# Altium PCB main.PcbDoc
Units mm, origin at the board's own origin, x right, y up, seen from the top; angles counter-clockwise.
Board outline 32 x 43.5 mm, 2 copper layers (Top Layer, Bottom Layer); 24 components, 10 nets, 55 pads, 11 vias.
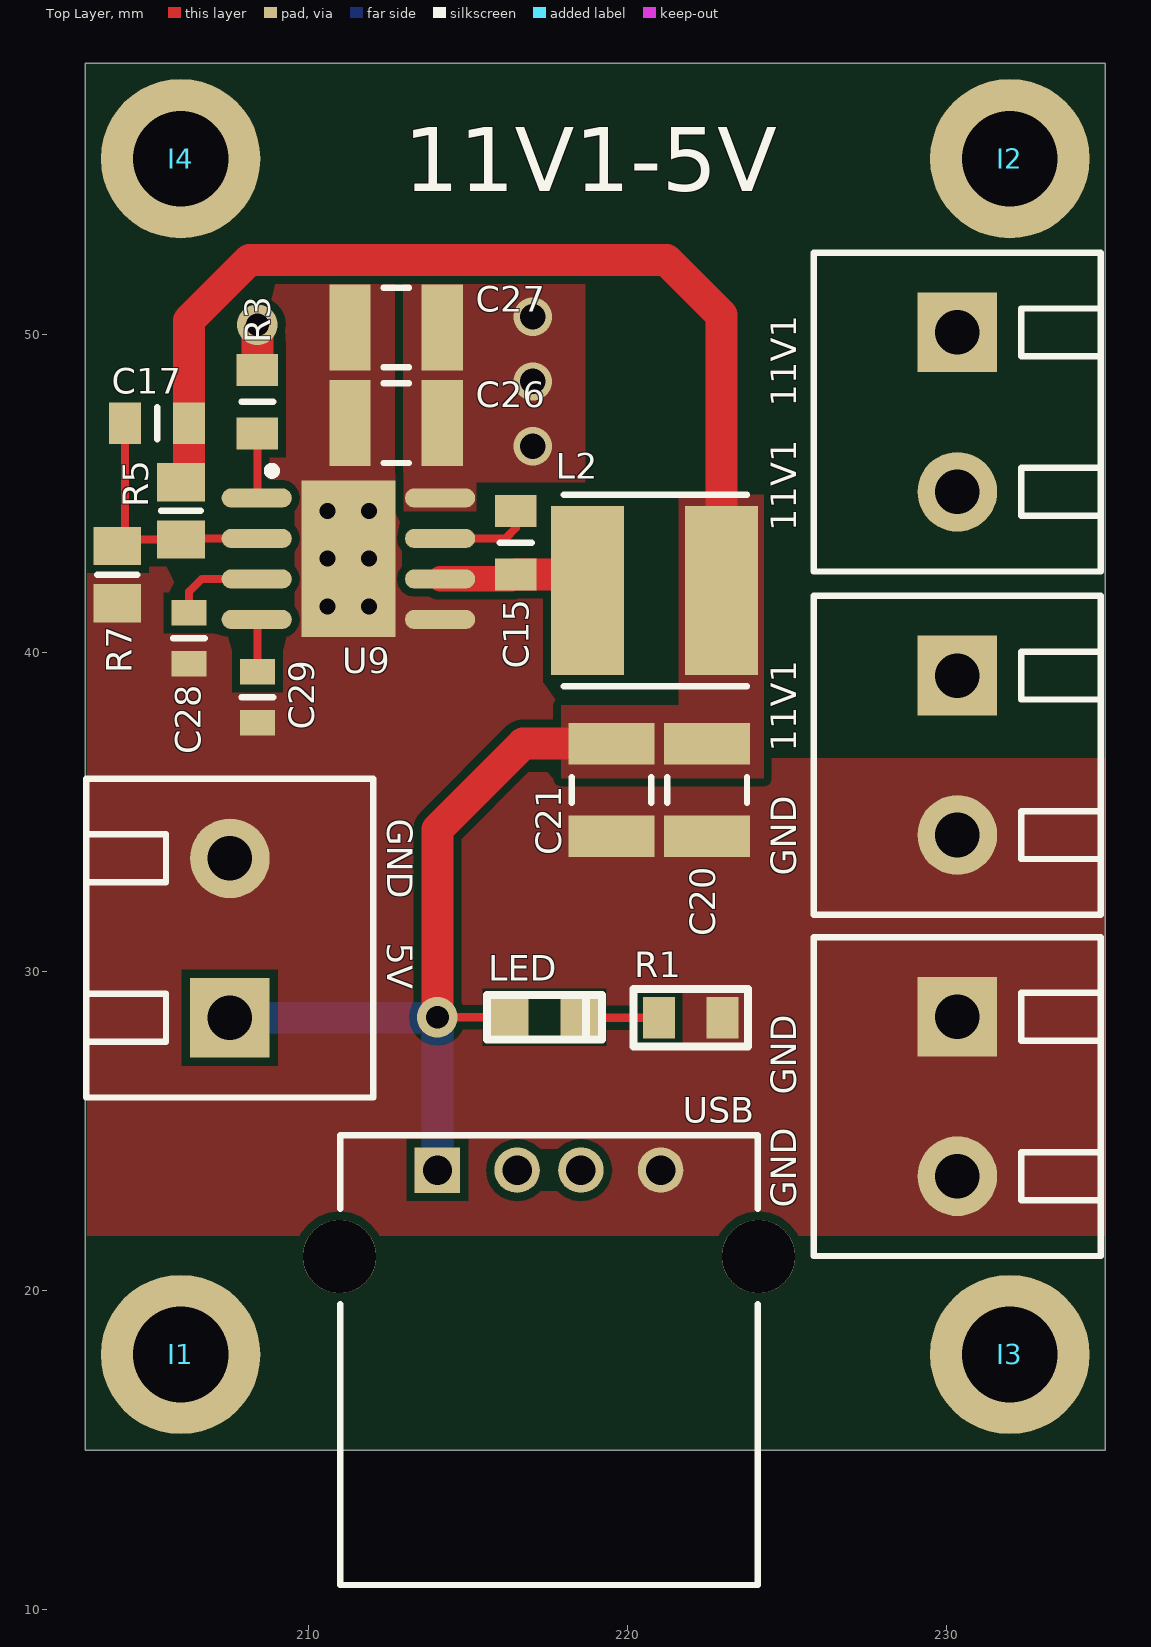
[diagram p0: Top Layer view]
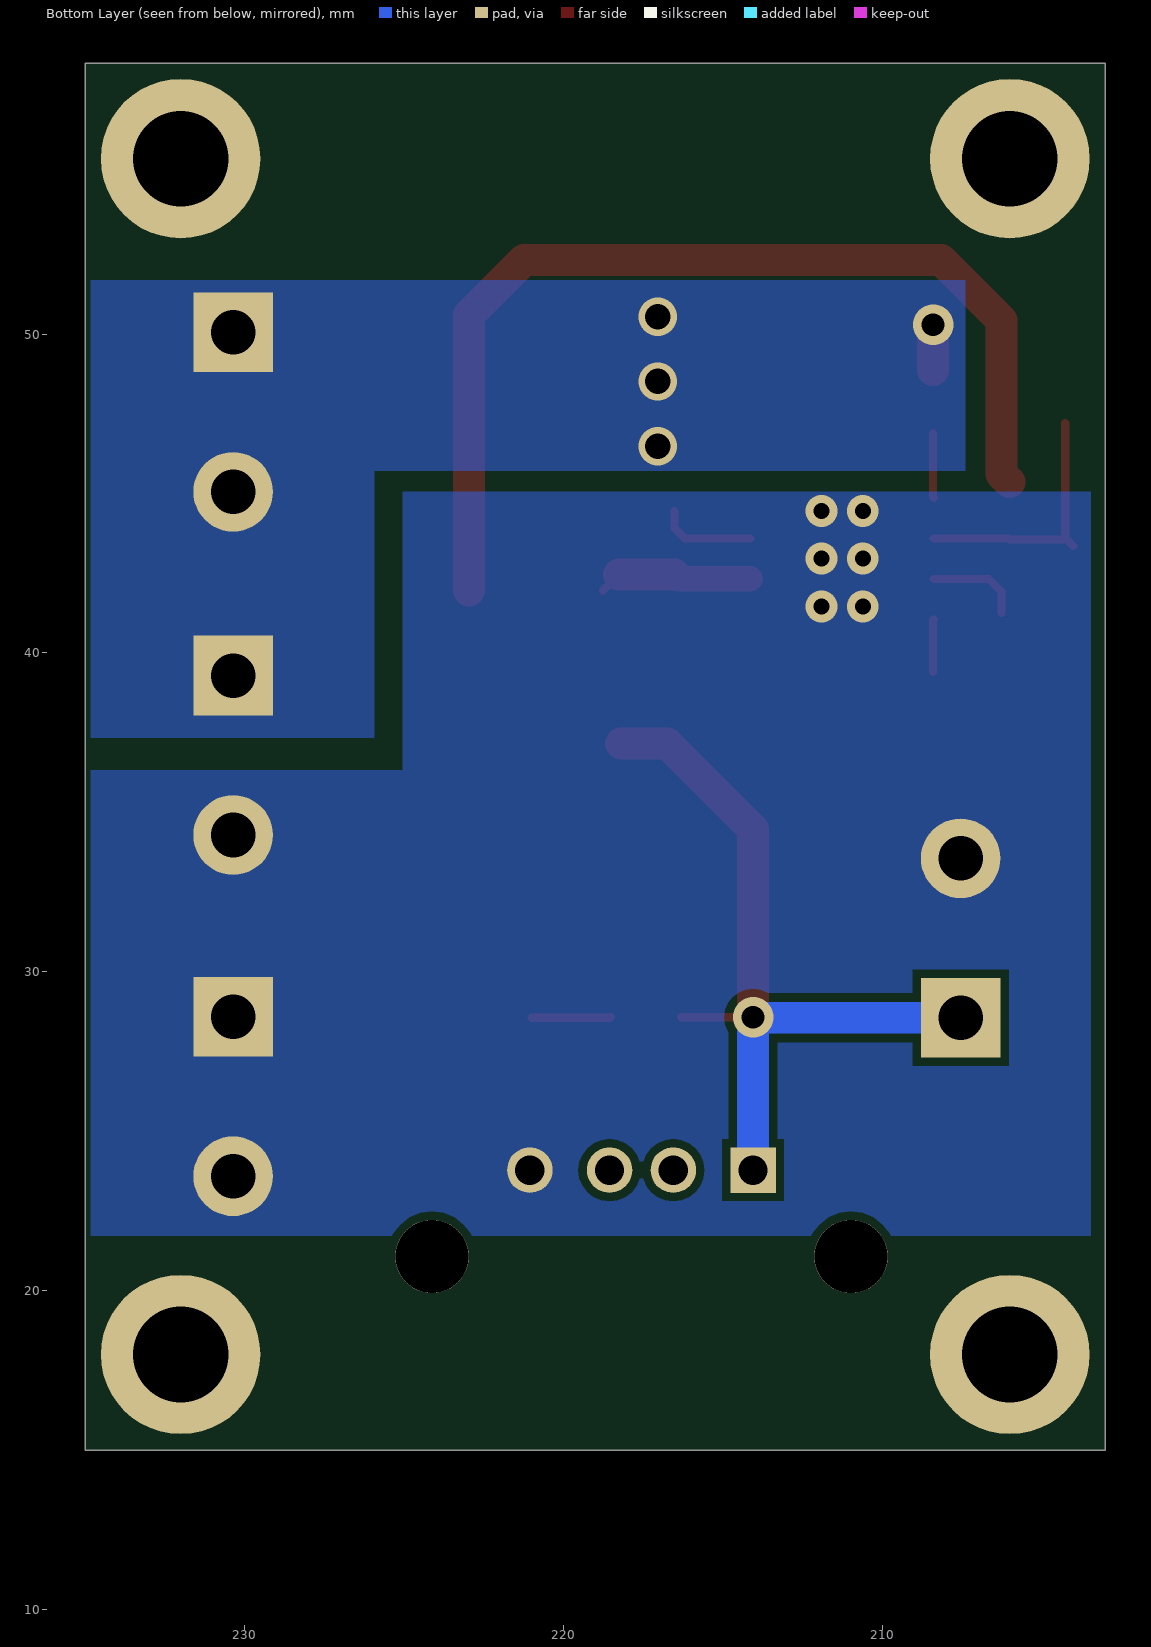
[diagram p1: Bottom Layer view, seen from below]
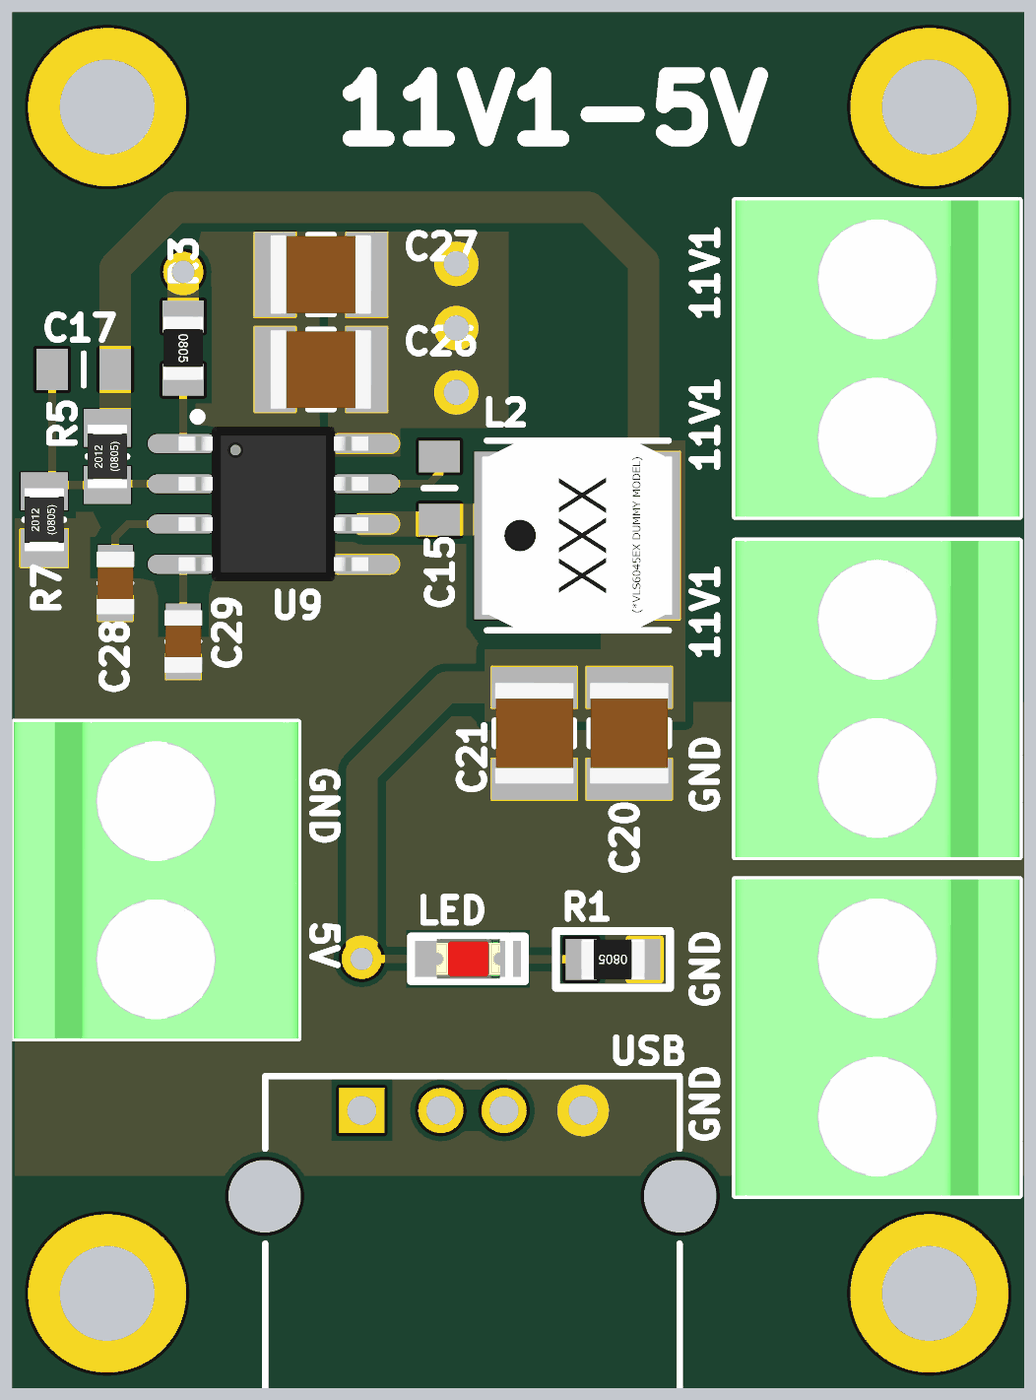
[diagram p2: 3D render of the assembled board from above, using the file's embedded part models]

## Layer stack, top to bottom
Top Solder: solder mask 0.0102, Solder Resist, Dk 3.5
Top Layer: signal copper 0.0356
Dielectric 1: dielectric 0.32, FR-4, Dk 4.8
Bottom Layer: signal copper 0.0356
Bottom Solder: solder mask 0.0102, Solder Resist, Dk 3.5

## Board outline
203,15 203,58.5 235,58.5 235,15

## Design rules (kind name [scope] priority, off if disabled: settings)
Clearance [All] p1: gap=0.254 ignorepadtopadclearanceinfootprint=FALSE except(0: Arc-Hole Track-Hole SMDPad-Hole THPad-Hole Via-Hole Fill-Hole Poly-Hole Region-Hole Text-Hole)
HoleSize [All] p1: absolutevalues=TRUE maxlimit=10 minlimit=0.025 maxpercent=80.000 minpercent=20.000
MinimumSolderMaskSliver [All] p1: minsoldermaskwidth=0
PlaneClearance [All] p1: clearance=1
PlaneConnect [All] p1: planeconnectstyle=Direct reliefexpansion=0.508 reliefentries=4 reliefconductorwidth=0.254 reliefairgap=0.254
PolygonConnect [All] p1: connectstyle=Direct reliefconductorwidth=0.254 reliefentries=4 polygonreliefangle="90 Angle" airgapwidth=0.254
RoutingVias [All] p1: holewidth=0.711 width=1.27 viastyle="Through Hole" minholewidth=0.711 minwidth=1.27 maxholewidth=0.711 maxwidth=1.27
SilkToSilkClearance [All] p1: silktosilkclearance=0
SilkToSolderMaskClearance [IsPad] p1: minsilkscreentomaskgap=0 clearancetoexposedcopper=TRUE
SolderMaskExpansion [All] p1: expansion=0.102
Width [All] p1: maxlimit=10.254 minlimit=0.254 preferedwidth=0.254
24 further rules are at their usual default settings.

## Classes and differential pairs
component class main: USB

## Components (designator, comment, footprint, x,y, rotation, side; value= is the part's Value field where it differs from the comment)
C15 "100nF" FP_0805_CAP_085 216.509,43.456 r270 top
C17 "22pF" FP_0805_CAP_085 205.259,47.206 r0 top
C20 "CL32A226KOJNNNE" 1210 222.509,35.706 r90 top
C21 "CL32A226KOJNNNE" 1210 219.509,35.706 r90 top
C26 "885012209005" 1210 212.759,47.206 r0 top
C27 "885012209005" 1210 212.759,50.206 r0 top
C28 "VJ0805Y105KXQTW1BC" 0805 206.259,40.456 r90 top
C29 "CC0805JRNP08BN332" 0805 208.407,38.608 r90 top
I1 "M3 screw drillhole" "3mm diameter drill"#1 203.073,17.411 r0 top
I2 "M3 screw drillhole" "3mm diameter drill"#2 230.355,55.626 r0 top
I3 "M3 screw drillhole" "3mm diameter drill"#3 230.355,17.907 r0 top
I4 "M3 screw drillhole" "3mm diameter drill"#4 203.708,55.765 r0 top
J1 "Connector_2pin" PT_2-5 230.505,36.735 r0 top
J2 "Connector_2pin" PT_2-5 230.505,47.498 r0 top
J3 "Connector_2pin" PT_2-5 230.505,26.035 r0 top
J4 "Connector_2pin" PT_2-5 207.391,31.115 r180 top
L2 "VLS6045EX-4R7M" TDK_IND_6045 218.759,41.956 r0 top
LED "LED Red" FP_0805_LED_RED 216.408,28.575 r0 top (schematic designator D1)
R1 "2K2" FP_0805_RES 221.996,28.56 r180 top
R3 "10K" FP_0805_RES 208.407,47.879 r270 top
R5 "CR0805-FX-1333ELF" 0805-W 206.009,44.456 r90 top
R7 "CR0805-FX-2402ELF" 0805-W 204.009,42.456 r90 top
U9 "TPS54227DDAR" "8-Pin HSOP with ThermalPad" 211.259,42.956 r0 top
USB "USB-A1HSW6" *OST_USB-A1HSW6 217.551,17.272 r0 top

## Footprints (in the part's own frame and the unit in brackets; to place one, negate y for a bottom-side part, rotate by r counter-clockwise, add the part's x,y. Pads: shape width x height; smd on the part's side, far side on the other; paste and mask are expansions set on the pad)
"3mm diameter drill"#1 [mm]
  round 5 hole 3: 0(2.927,0.589)
"3mm diameter drill"#2 [mm]
  round 5 hole 3: 0(1.645,-0.126)
"3mm diameter drill"#3 [mm]
  round 5 hole 3: 0(1.645,0.093)
"3mm diameter drill"#4 [mm]
  round 5 hole 3: 0(2.292,-0.265)
"8-Pin HSOP with ThermalPad" [mm]
  rect 2.95x4.9 smd paste-10 mask-10: 0(0,0)
  oval 2.2x0.6 smd mask+0.035: 1(-2.875,1.905) 2(-2.875,0.635) 3(-2.875,-0.635) 4(-2.875,-1.905) 5(2.875,-1.905) 6(2.875,-0.635) 7(2.875,0.635) 8(2.875,1.905)
  silkscreen extent -2.52,2.63 -2.27,2.88, body extent -3,-2.45 3,2.45, height 1.7
0805 [mm]
  rect 0.8x1.1 smd mask+0.035: 1(-0.8,0) 2(0.8,0)
  silkscreen extent 0,-0.5 0,0.5, body extent -1,-0.6 1,0.6, height 1.2
0805-W [mm]
  rect 1.2x1.5 smd mask+0.035: 1(-0.9,0) 2(0.9,0)
  silkscreen extent 0,-0.63 0,0.63, body extent -1,-0.62 1,0.63, height 0.45
1210 [mm]
  rect 1.3x2.7 smd mask+0.035: 1(-1.45,0) 2(1.45,0)
  silkscreen extent -0.4,-1.25 0.4,1.25, body extent -1.6,-1.25 1.6,1.25, height 2.5
*OST_USB-A1HSW6 [mm]
  round 2.3 hole 2.3 unplated: 0(-6.57,3.8) 0(6.57,3.8)
  rect 1.428x1.428 hole 0.92: 1(-3.5,6.51)
  round 1.428 hole 0.92: 2(-1,6.51) 3(1,6.51) 4(3.5,6.51)
  silkscreen extent -6.55,-6.5 6.55,7.6
FP_0805_CAP_085 [mm] "0805 kapacitás YAGEO 0.85mm magas"
  rect 1x1.3 smd: 1(-1,0) 2(1,0)
  silkscreen extent 0,-0.5 0,0.5, body extent -1,-0.64 1.03,0.64, height 0.85
FP_0805_LED_RED [mm] "0805 méretû piros LED"
  rect 1.2x1.3 smd: A(-0.1,0) K(2.1,0)
  silkscreen extent -0.8,-0.7 2.8,0.7, body extent 0.01,-0.63 2.03,0.62, height 1.1
FP_0805_RES [mm] "0805 ellenállás"
  rect 1x1.3 smd: 1(-1,0) 2(1,0)
  silkscreen extent -1.8,-0.9 1.8,0.9, body extent -1,-0.62 1,0.63, height 0.62
PT_2-5 [mm] "PCB terminal block, nominal current: 32 A, nom. voltage: 400 V, pitch: 5 mm, number of positions: 2"
  rect 2.5x2.5 hole 1.4: 1(-0.15,2.555)
  round 2.5 hole 1.4: 2(-0.15,-2.445)
  silkscreen extent -4.65,-4.95 4.35,5.05, body extent -4.65,-4.95 4.35,5.05, height 13.55
TDK_IND_6045 [mm]
  rect 2.3x5.3 smd mask+0.035: 1(0,0) 2(4.2,0)
  silkscreen extent -0.75,-3 5,3, body extent -0.9,-3 5.1,3, height 4.54

## Part data
C15: library part "CAP 100nF", "Capacitor", Tolerance=+80%/-20%, Voltage=25V, Name="SMD Multilayer Ceramic Capacitor, 0805", Reference=1759167, Supplier=Farnell
C17: library part "CAP 22pF", "Capacitor", Tolerance=5%, Voltage=50V, Name="SMD Multilayer Ceramic Capacitor, 0805", Reference=1759195, Supplier=Farnell
C20 C21: "22uF 1210 10% 16V X5R CL32A226KOJNNNE (SAM) [ 82-08-05 ]", Capacitance=22u
C26 C27: "SMD Multilayer Ceramic Capacitor, 1210 [3225 Metric], 10 µF, 10 V, ± 10%, X7R, WCAP-CSGP Series", Capacitance=10uF
C28: "SMD Multilayer Ceramic Capacitor, 0805 [2012 Metric], 1 µF, 10 V, ± 10%, X7R, VJ Series", Capacitance=1uF
C29: "3.3nF 0805 5% 25V NP0 CC0805JRNP08BN332 (YAG) [ 82-04-69 ]", Capacitance=3.3n
I1 I2 I3 I4: "5mm diameter via with 3mm hole"
L2: "Power Inductor (SMD), 4.7 µH, 4.2 A, Wirewound, 5.8 A, VLS-EX Series, 6mm x 6mm x 4.5mm", Inductance=4.7u
LED: "Red LED", I_max=20mA, Name="MULTICOMP  MCL-S270SRC  LED, Red, SMD, 1.25mm x 1.4mm, 20 mA, 1.85 V, 643 nm", Reference=1581239, Supplier=Farnell, U_fw=1.85V, Wavelength=643nm
R1: library part "RES 2K2", "Resistor", Power=125mW, Tolerance=1%, Name="VISHAY  CRCW08052K20FKEA  SMD Chip Resistor, Thick Film, 2.2 kohm, 150 V, 0805 [2012 Metric], 125 mW, ± 1%, CRCW Series", Reference=1469887, Supplier=Farnell
R3: library part "RES 10K", "Resistor", Power=125mW, Tolerance=5%, Name="YAGEO (PHYCOMP)  RC0805JR-0710KL  SMD Chip Resistor, Thick Film, 10 kohm", Reference=9234136, Supplier=Farnell
R5: "SMD Chip Resistor, 133kOhm, 0805", Resistance=133kOhm
R7: "SMD Chip Resistor, 24kOhm, 0805", Resistance=24kOhm
U9: "DC-DC Switching (Step Down) Regulator, Adjustable, 700 kHz, 4.5-18Vin, up to 7V/2Aout, SO PowerPAD-8"
USB: "USB - A Receptacle Connector 4 Position Through Hole, Right Angle", Package=None, Availability=Unavailable, MF="On Shore", MP=USB-A1HSW6, Price=None, SnapEDA_Link=https://www.snapeda.com/parts/USB-A1HSW6/On%20Shore%20Technology%20Inc./view-part/13110/?ref=snap

## Via types
v1: diameter 1, hole 0.5, Top Layer to Bottom Layer, tented both sides, 6 vias
v2: diameter 1.2, hole 0.8, Top Layer to Bottom Layer, 3 vias
v3: diameter 1.27, hole 0.711, Top Layer to Bottom Layer, 2 vias

## Nets (pads, with @x,y where several pads share a name; then routed paths per layer and width w, separated by ;. In a path a pad name is that pad's centre, name@x,y a point inside that pad or via, vN(x,y) a via of type N, cw(c..) or ccw(c..) an arc to the next point about the centre after c; other vN are vias at no path point)
5V: C17.2 C20.2 C21.2 J4.1 L2.2 LED.A R5.2 USB.1 | length 57
  Top Layer w0.254: v3(214.051,28.575) LED.A
  Top Layer w1: R5.2 206.259,45.606 C17.2 206.259,50.43 208.153,52.324 221.234,52.324 222.959,50.599 L2.2 ; v3(214.051,28.575) 214.051,34.473 216.734,37.156 C21.2@218.186,37.156
  Bottom Layer w1: J4.1@207.264,28.56 J4.1 214.051,28.56 USB.1
11V1: C26.2 C27.2 J1.1 J2.1 J2.2 R3.1 U9.8 | length 1.4
  Top Layer w1: R3.1 v3(208.407,50.292)
  other v2: 217.043,46.482 217.043,48.514 217.043,50.546
GND: C20.1 C21.1 C26.1 C27.1 C28.1 C29.1 J1.2 J3.1 J3.2 J4.2 R1.1 R7.1 U9.0 U9.5 USB.4
  other v1: 210.609,41.456 211.909,41.456 210.609,42.956 211.909,42.956 210.609,44.456 211.909,44.456
NetC15_1: C15.1 U9.7 | length 3
  Top Layer w0.254: U9.7 216.184,43.591 216.509,43.916 C15.1
NetC15_2: C15.2 L2.1 U9.6 | length 4.9
  Top Layer w0.254: C15.2@216.374,42.321 C15.2 ; L2.1@218.259,42.456 L2.1
  Top Layer w0.8: U9.6 C15.2@216.374,42.321
  Top Layer w1: C15.2 L2.1@218.259,42.456
NetC17_1: C17.1 R5.1 R7.2 U9.2 | length 8.1
  Top Layer w0.254: R7.2 R7.2@204.209,43.556 ; C17.1 204.259,43.606 R7.2@204.209,43.556 ; U9.2 206.044,43.591 R5.1 R7.2@204.209,43.556
NetC28_2: C28.2 U9.3 | length 3
  Top Layer w0.254: C28.2 206.259,41.921 206.659,42.321 U9.3
NetC29_2: C29.2 U9.4 | length 1.7
  Top Layer w0.254: U9.4 208.407,41.028 C29.2
NetD1_2: LED.K R1.2 | length 2.5
  Top Layer w0.254: LED.K 218.523,28.56 R1.2
NetR3_2: R3.2 U9.1 | length 2
  Top Layer w0.254: U9.1 208.407,44.884 R3.2
pads on no net: I1.0 I2.0 I3.0 I4.0 USB.0 USB.2 USB.3

## Polygon pours and split planes (outlines as drawn)
GND on Top Layer "Top Layer-GND" (solid, remove dead copper, pour order 22): 235,31.496 235,36.703 224.536,36.703 224.536,51.689 203.073,51.689 203.073,21.717 235,21.717
11V1 on Top Layer "Top Layer-11V1" (solid, pour order 26): 216.196,51.689 216.196,49.276 207.603,49.276 207.603,51.662 207.576,51.689
5V on Top Layer "Top Layer-5V" (solid, remove dead copper, pour order 10): 221.615,44.958 224.282,44.958 224.282,36.068 217.932,36.068 217.932,38.354 221.615,38.354
11V1 on Top Layer "Top Layer-11V1 1" (solid, pour order 20): 212.979,51.689 218.694,51.689 218.694,45.356 212.979,45.356
11V1 on Top Layer "Top Layer-11V1 2" (solid, pour order 16): 215.265,51.689 212.979,51.689 212.979,44.45 215.265,44.45
no net on Top Layer "Top Layer-No Net" (solid, pour order 14): 212.979,44.45
GND on Bottom Layer (solid, remove dead copper, pour order 28): 225.044,36.322 225.044,45.053 203.454,45.053 203.454,36.322 203.454,21.717 234.823,21.717 234.823,36.322
11V1 on Bottom Layer "Bottom Layer-11V1" (solid, pour order 18): 207.391,51.689 234.823,51.689 234.823,37.338 225.933,37.338 225.933,45.72 207.391,45.72

## Silkscreen, mask and mechanical layers (free items; w line width, h text height)
Top Overlay:
  text "11V1-5V" at 212.988,54.483 h2
  text "11V1   11V1" at 225.298,43.815 h0.8 r90
  text "GND    5V" at 212.471,34.798 h0.8 r270
  text "GND    11V1" at 225.298,33.02 h0.8 r90
  text "GND   GND" at 225.298,22.606 h0.8 r90
Mechanical 1:
  the board outline again, w0.254